# Altium PCB Modulo_Servos.PcbDoc
Units mil, origin at the board's own origin, x right, y up, seen from the top; angles counter-clockwise.
Board outline 3190 x 4055 mil, 2 copper layers (Top Layer, Bottom Layer); 41 components, 39 nets, 157 pads, 4 vias.
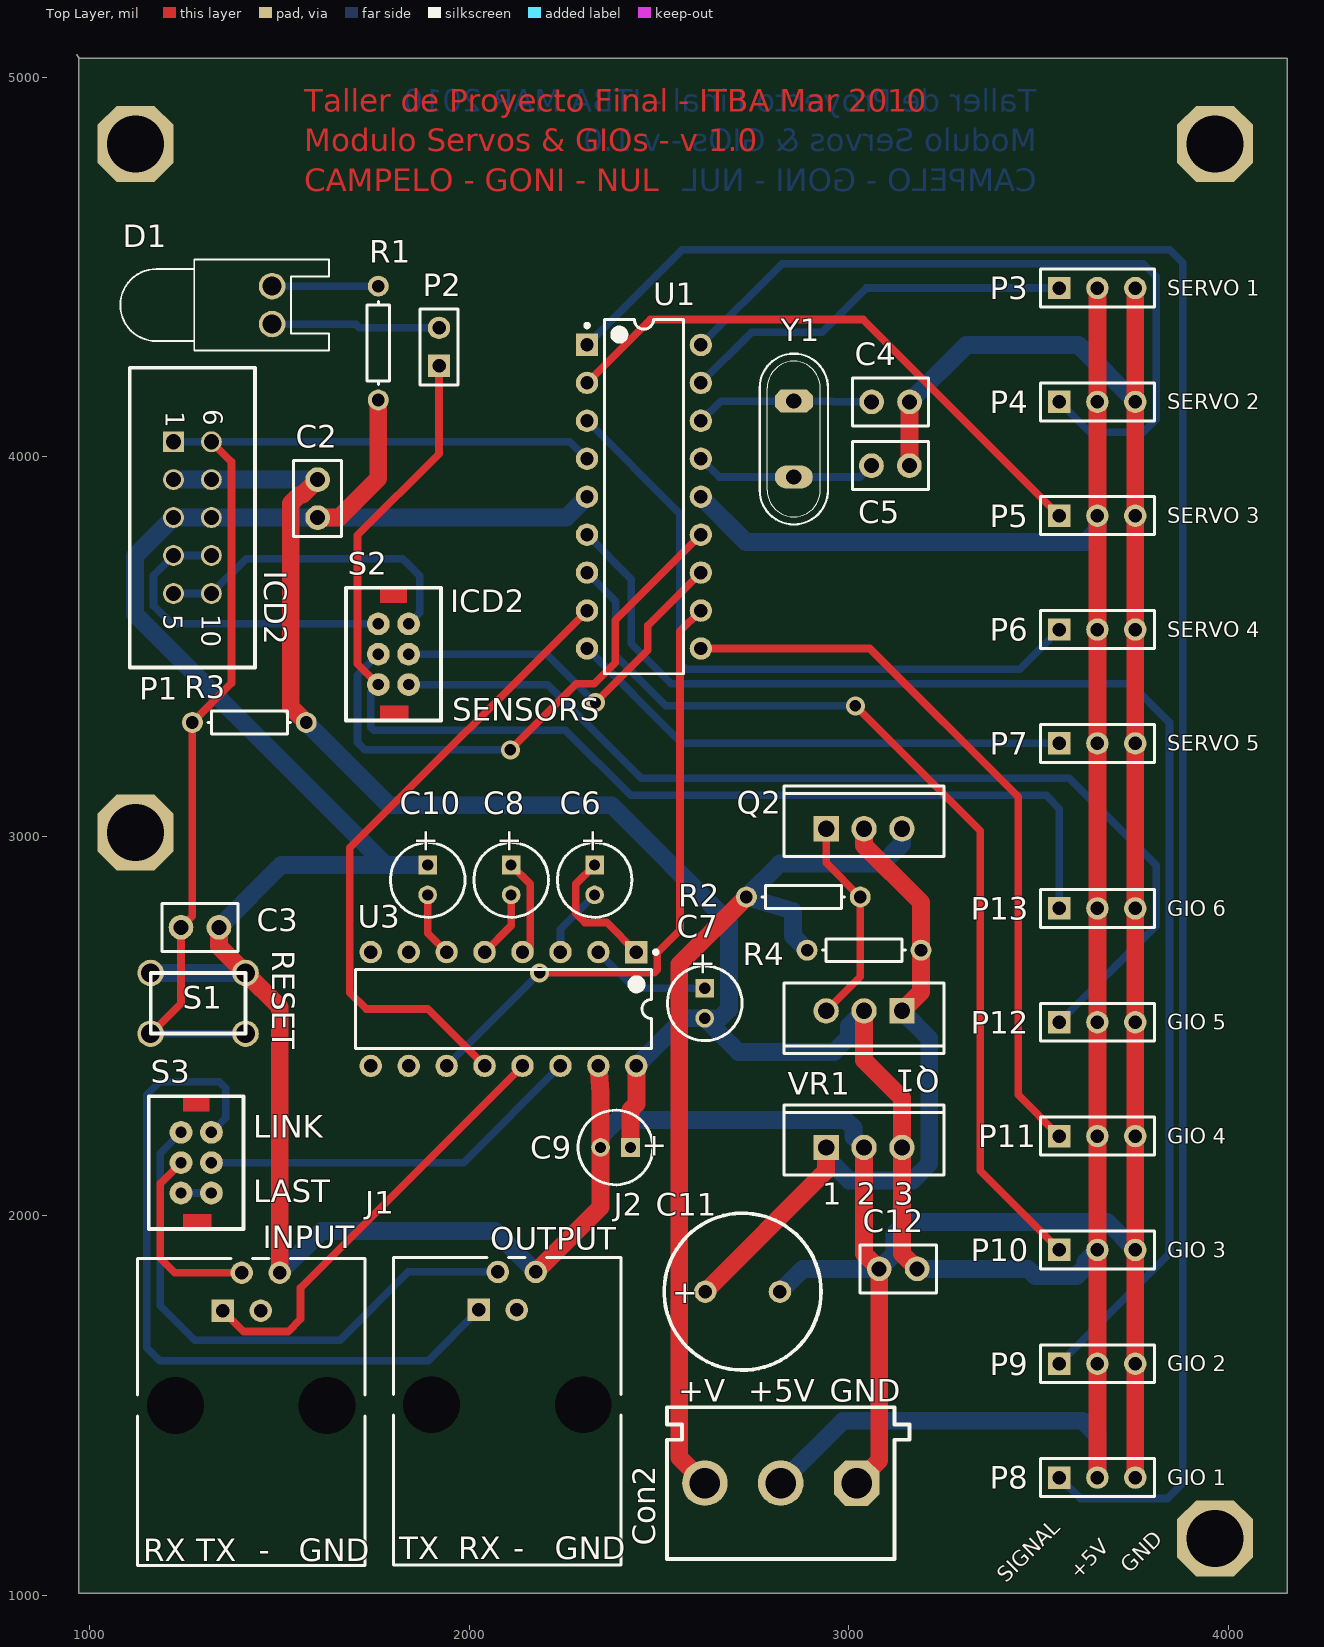
[diagram p0: Top Layer view]
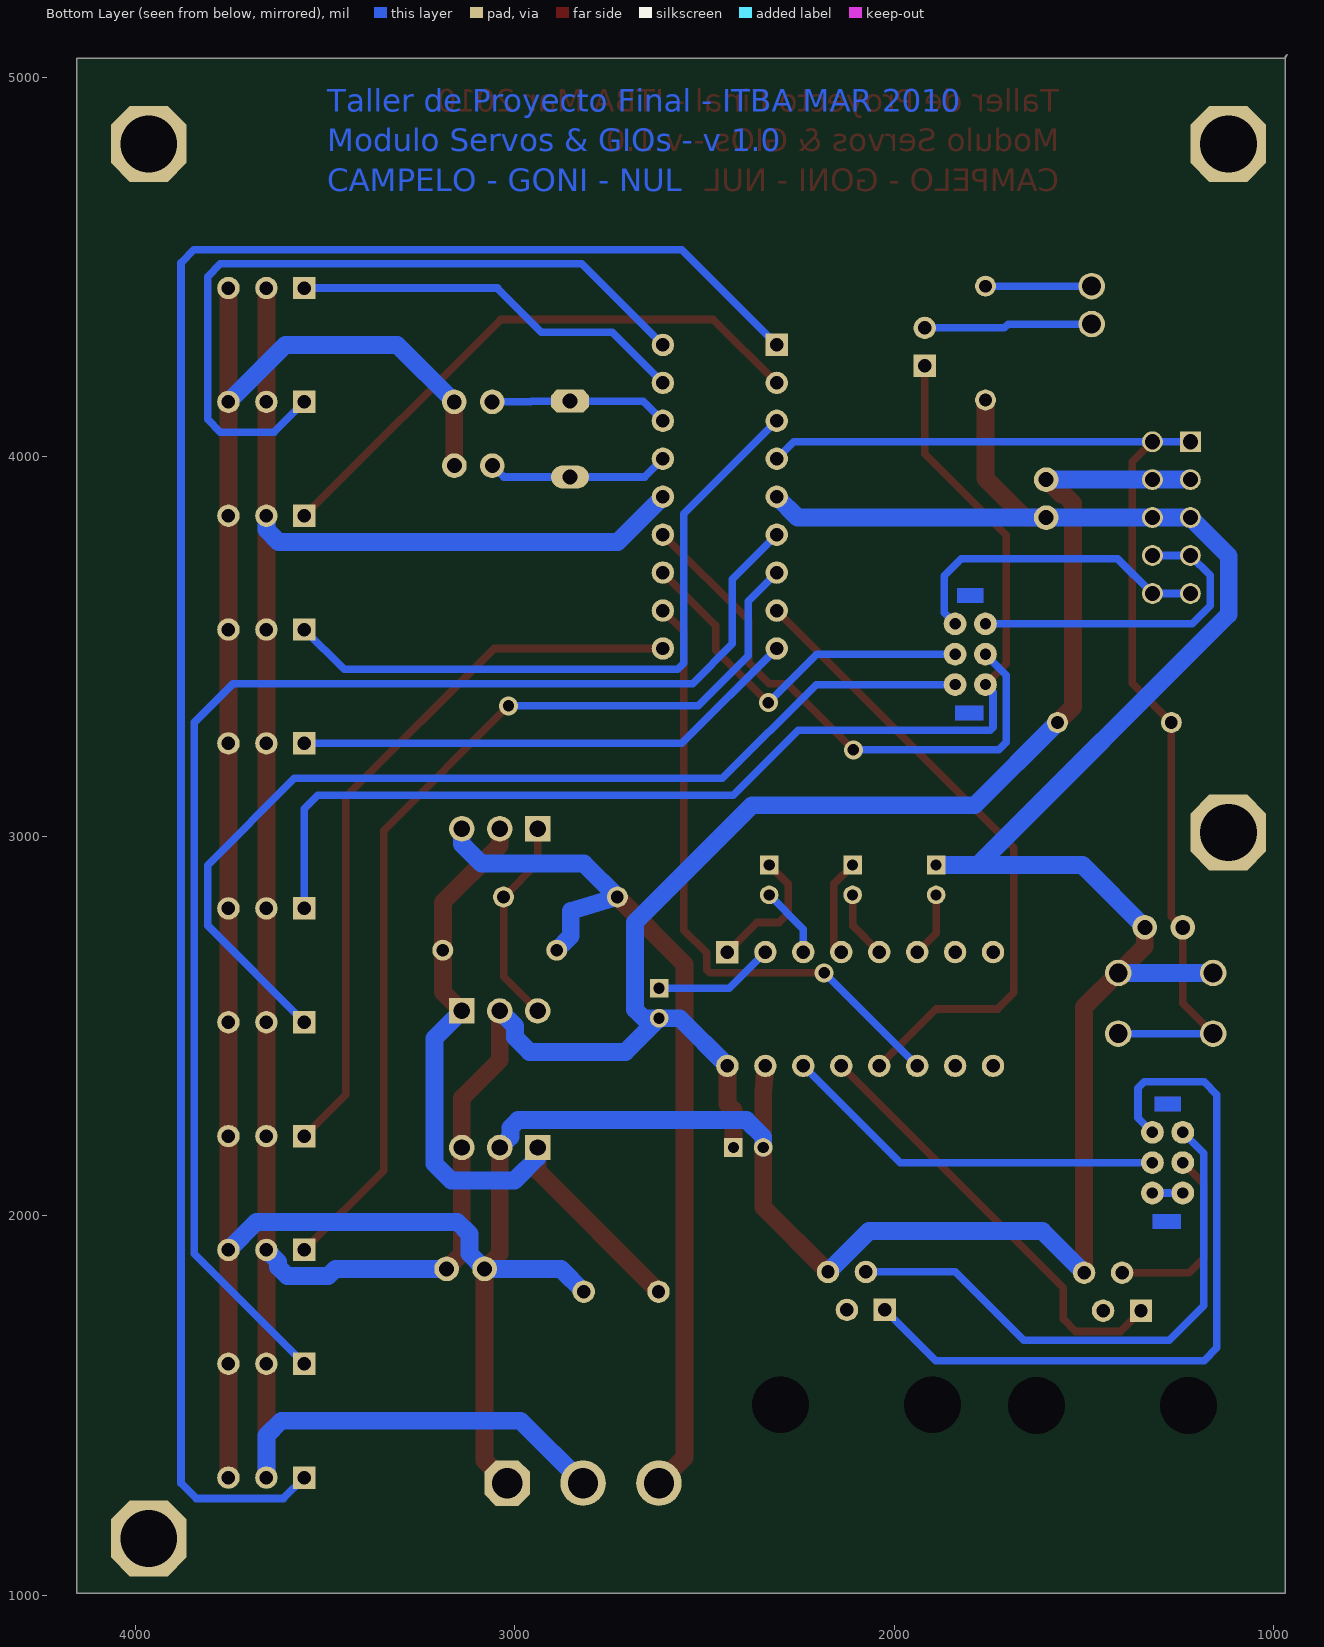
[diagram p1: Bottom Layer view, seen from below]

## Layer stack, top to bottom
Top Layer: signal copper 1.4
Dielectric: dielectric 12.6, FR-4, Dk 4.8
Bottom Layer: signal copper 1.4

## Board outline
970,5050 4155,5050 4155,1005 970,1005 970,5055 965,5060

## Design rules (kind name [scope] priority, off if disabled: settings)
Clearance [All] p1: gap=15
DiffPairsRouting [All] p1: maxlimit=10 minlimit=10 mostfreqgap=10 maxuncoupledlength=750
PolygonConnect [All] p1: connectstyle=Relief reliefconductorwidth=10 reliefentries=4 polygonreliefangle="90 Angle"
RoutingVias [All] p1: holewidth=30 width=50 viastyle="Through Hole" minholewidth=30 minwidth=50 maxholewidth=50 maxwidth=70
SilkscreenOverComponentPads [All] p1: minsilkscreentomaskgap=10
SolderMaskExpansion [All] p1: expansion=4
Width Signal [NOT (InNet('+5V VCC') OR InNet('+V LOGIC') OR InNet('GND') OR InNet('+V IN') OR InNet('VCC_SENSOR_1') OR InNet('VCC_SENSOR_2') OR InNet('VCC_SENSOR_3') OR InNet('VCC_SENSOR_4') OR InNet('VCC_SENSOR_5'))] p1: maxlimit=25 minlimit=15 preferedwidth=20 minimp=50.000000 maximp=50.000000 favimp=50.000000
Width Power [(InNet('+5V VCC') OR InNet('+V LOGIC') OR InNet('GND') OR InNet('+V IN') OR InNet('VCC_SENSOR_1') OR InNet('VCC_SENSOR_2') OR InNet('VCC_SENSOR_3') OR InNet('VCC_SENSOR_4') OR InNet('VCC_SENSOR_5'))] p2: maxlimit=47 minlimit=47 preferedwidth=47 minimp=50.000000 maximp=50.000000 favimp=50.000000
26 further rules are at their usual default settings.

## Components (designator, comment, footprint, x,y, rotation, side; value= is the part's Value field where it differs from the comment)
C2 "Cap" CAPR2.54-5.1x3.2 1600,3890 r90 top
C3 "Cap" CAPR2.54-5.1x3.2 1290,2760 r180 top
C4 "Cap" CAPR2.54-5.1x3.2 3110,4145 r180 top
C5 "Cap" CAPR2.54-5.1x3.2 3109.61,3977.01 r180 top
C6 "Cap Pol1" CAPPR2-5x6.8 2330,2885 r270 top
C7 "Cap Pol1" CAPPR2-5x6.8 2620,2560 r270 top
C8 "Cap Pol1" CAPPR2-5x6.8 2110,2885 r270 top
C9 "Cap Pol1" CAPPR2-5x6.8 2385,2180 r180 top
C10 "Cap Pol1" CAPPR2-5x6.8 1890,2885 r270 top
C11 "Cap Pol1" RB5-10.5 2720,1800 r0 top
C12 "Cap" CAPR2.54-5.1x3.2 3130,1860 r0 top
Con2 "POWER_A" My_CN3 3120,1095 r180 top
D1 "LED0" LED-0 1480,4400 r270 top
J1 "SERIAL A" 15-43-6245 1425,1077.95 r0 top
J2 "SERIAL B" 15-43-6245 2100,1080 r0 top
P1 "ICD2" HEADER10_5x2_B 1270,3840 r270 top
P2 "LED1" HDR1X2 1920,4240 r90 top
P3 "SERVO 1" HDR1X3 3555,4445 r0 top
P4 "SERVO 2" HDR1X3 3555,4145 r0 top
P5 "SERVO 3" HDR1X3 3555,3845 r0 top
P6 "SERVO 4" HDR1X3 3555,3545 r0 top
P7 "SERVO 5" HDR1X3 3555,3245 r0 top
P8 "GIO 1" HDR1X3 3555,1310 r0 top
P9 "GIO 2" HDR1X3 3555,1610 r0 top
P10 "GIO 3" HDR1X3 3555,1910 r0 top
P11 "GIO 4" HDR1X3 3555,2210 r0 top
P12 "GIO 5" HDR1X3 3555,2510 r0 top
P13 "GIO 6" HDR1X3 3555,2810 r0 top
Q1 "TIP42" TO-220 3040,2540 r180 top
Q2 "TIP42" TO-220 3040,3020 r0 top
R1 "Res1" AXIAL-0.3 1760,4300 r270 top
R2 "Res1" AXIAL-0.3 2880,2840 r0 top
R3 "Res1" AXIAL-0.3 1420,3300 r0 top
R4 "Res1" AXIAL-0.3 3040,2700 r0 top
S1 "SW-PB" TS-063 1285,2560 r0 top
S2 "PROGRAM SELECTION" LD-202mini 1800,3480 r270 top
S3 "SERIAL CHAIN" LD-202mini 1280,2140 r270 top
U1 "PIC16F88" PDIP300-P18 2460,3895 r0 top
U3 "MAX232" PE16A 2090,2545 r270 top
VR1 "7805" TO-220 3040,2180 r0 top
Y1 "20MHz" My_Crystal 2855,4047.01 r270 top

## Footprints (in the part's own frame and the unit in brackets; to place one, negate y for a bottom-side part, rotate by r counter-clockwise, add the part's x,y. Pads: shape width x height; smd on the part's side, far side on the other; paste and mask are expansions set on the pad)
15-43-6245 [mm] "Connector; PCB Jack, Thru-Hole; 1-Port; Unshielded without Lightpipes; Right Angle"
  rect 1.5x1.5 hole 0.9: 1(-1.905,17.07)
  round 1.5 hole 0.9: 2(-0.635,19.61) 3(0.635,17.07) 4(1.905,19.61)
  round 2.95 hole 3.81 unplated: MH1(-5.08,10.72) MH2(5.08,10.72)
  silkscreen extent -7.62,0 7.62,20.57
AXIAL-0.3 [mm] "Axial Device, Thru-Hole; 2 Leads; 0.3 in Pin Spacing"
  round 1.4 hole 0.85: 1(-3.81,0) 2(3.81,0)
  silkscreen extent -2.77,-0.76 2.77,0.76
CAPPR2-5x6.8 [mm] "Capacitor, Electrolytic, Radial; Body 5 x 6.8 mm (Dia.xH typ); Pin Spacing 2 mm (typ)"
  rect 1.25x1.25 hole 0.75: 1(-1,0)
  round 1.25 hole 0.75: 2(1,0)
  silkscreen extent -2.5,-2.5 2.5,2.5
CAPR2.54-5.1x3.2 [mm] "Capacitor, Ceramic, Thru-Hole, Dipped Radial; Body 5.1 x 3.2 mm (WxT) Pin Spacing 2.54 mm (typ)"
  round 1.65 hole 1: 1(-1.27,0) 2(1.27,0)
  silkscreen extent -2.55,-1.6 2.55,1.6
HDR1X2 [mm] "Connector; Header; 2 Position"
  rect 1.5x1.5 hole 0.9: 1(0,0)
  round 1.5 hole 0.9: 2(2.54,0)
  silkscreen extent -1.27,-1.27 3.81,1.27
HDR1X3 [mm] "Connector; Header; 3 Position"
  rect 1.5x1.5 hole 0.9: 1(0,0)
  round 1.5 hole 0.9: 2(2.54,0) 3(5.08,0)
  silkscreen extent -1.27,-1.27 6.35,1.27
HEADER10_5x2_B [mil] "Header con polaridad para 10 pines (5x2)"
  rect 55x55 hole 40: 1(-200,-50)
  round 55 hole 40: 2(-100,-50) 3(0,-50) 4(100,-50) 5(200,-50) 6(-200,50) 7(-100,50) 8(0,50) 9(100,50) 10(200,50)
  silkscreen extent -395,-165 395,165
LD-202mini [mil] "Doble inversor mini 90 grados"
  round 60 hole 30: 1(0,40) 2(-80,40) 3(80,40) 4(0,-40) 5(-80,-40) 6(80,-40)
  Multi-Layer region: 135,-35 175,-35 175,40 135,40
  Multi-Layer region: -175,-35 -135,-35 -135,35 -175,35
  silkscreen extent -175,-125 175,125
LED-0 [mil] "Typical INFRARED GaAs LED; 2 Leads"
  round 70 hole 50: 1(50,0) 2(-50,0)
  silkscreen extent -120,-400 120,150
My_CN3 [mil]
  oct 120x120 hole 80: 1(99.5,-200.5)
  round 120 hole 80: 2(299.5,-200.5) 3(499.5,-200.5)
  silkscreen extent -40,-400 600,0
My_Crystal [mil]
  oct 60x100 hole 40: 1(-100,0)
  oval 60x100 hole 40: 2(100,0)
  silkscreen extent -225,-90 225,90
PDIP300-P18 [mm] "DIP, 18-Leads, Row Spacing 7.62mm, Pitch 2.54mm, Body 22.9x6.6mm"
  rect 1.5x1.5 hole 0.9: 1(-3.81,10.16)
  round 1.5 hole 0.9: 2(-3.81,7.62) 3(-3.81,5.08) 4(-3.81,2.54) 5(-3.81,0) 6(-3.81,-2.54) 7(-3.81,-5.08) 8(-3.81,-7.62) 9(-3.81,-10.16) 10(3.81,-10.16) 11(3.81,-7.62) 12(3.81,-5.08) 13(3.81,-2.54) 14(3.81,0) 15(3.81,2.54) 16(3.81,5.08) 17(3.81,7.62) 18(3.81,10.16)
  silkscreen extent -3.93,-11.85 2.65,11.85, body extent -3.6,-11.8 3.6,11.8, height 5.34
PE16A [mm] "DIP, 16-Leads, Row Spacing 7.62mm, Pitch 2.54mm, Body 19.18x6.99mm"
  rect 1.5x1.5 hole 0.9: 1(-3.81,8.89)
  round 1.5 hole 0.9: 2(-3.81,6.35) 3(-3.81,3.81) 4(-3.81,1.27) 5(-3.81,-1.27) 6(-3.81,-3.81) 7(-3.81,-6.35) 8(-3.81,-8.89) 9(3.81,-8.89) 10(3.81,-6.35) 11(3.81,-3.81) 12(3.81,-1.27) 13(3.81,1.27) 14(3.81,3.81) 15(3.81,6.35) 16(3.81,8.89)
  silkscreen extent -3.93,-9.9 2.65,10.32, body extent -3.3,-9.9 3.3,9.9, height 5.08
RB5-10.5 [mm] "Motor, General Kind; 2 Leads"
  round 1.5 hole 0.9: 1(-2.5,0) 2(2.5,0)
  silkscreen extent -5.25,-5.25 5.25,5.25
TO-220 [mm] "TO, Thru-Hole, Vertical, Heatsink Mounted; 3 In-Line Leads; Pitch 2.54 mm"
  rect 1.7x1.7 hole 1.1: 1(-2.54,0)
  round 1.7 hole 1.1: 2(0,0) 3(2.54,0)
  silkscreen extent -5.35,-1.85 5.35,2.85
TS-063 [mil] "Boton normal abierto"
  round 70 hole 50: 1(-125,80) 1(125,80) 2(-125,-80) 2(125,-80)
  silkscreen extent -125,-80 125,80

## Part data
C2 C3 C4 C5 C12: "Capacitor"
C6 C7 C8 C9 C10 C11: "Polarized Capacitor (Radial)"
Con2: library part "CON3 pin Green", "Connector green screw"
D1: "Typical INFRARED GaAs LED"
J1 J2: library part 15-43-6245, "Right Angle, Standard Profile, RJ45-Keyed, Flange Mount PCB Jack"
P1: library part "Header 5X2A", "Header, 5-Pin, Dual row"
P2: library part "Header 2", "Header, 2-Pin"
P3 P4 P5 P6 P7 P8 P9 P10 P11 P12 P13: library part "Header 3", "Header, 3-Pin"
Q1 Q2: library part D45H8, "PNP Power Amplifier"
R1 R2 R3 R4: "Resistor"
S1: "Switch"
S2 S3: library part SW-DPDT, "Double-Pole, Double-Throw Switch"
U1: library part PIC16F88-E/P, "Enhanced FLASH Microcontroller with nanoWatt Technology, 10-Bit A/D, 4K (x14-Bit words) FLASH, 368 Bytes RAM, 18-Pin PDIP, Standard VDD Range, Extended Temperature"
U3: library part MAX232ACPE, "+5V Powered, Multi-Channel RS-232 Driver/Receiver"
VR1: library part "Volt Reg", "Voltage Regulator"
Y1: library part XTAL, "Crystal Oscillator"

## Free pads (board coordinates)
  oct 200x200 hole 150: 1(1120,3010) 1(1120,4825) 1(3965,1150) 1(3965,4825)

## Via types
v1: diameter 50, hole 30, Top Layer to Bottom Layer, 4 vias

## Nets (pads, with @x,y where several pads share a name; then routed paths per layer and width w, separated by ;. In a path a pad name is that pad's centre, name@x,y a point inside that pad or via, vN(x,y) a via of type N, cw(c..) or ccw(c..) an arc to the next point about the centre after c; other vN are vias at no path point)
"+5V VCC": C2.2 C7.2 C9.1 C12.2 Con2.2 P1.2 P1.7 P3.2 P4.2 P5.2 P6.2 P7.2 P8.2 P9.2 P10.2 P11.2 P12.2 P13.2 Q1.2 R3.2 U1.14 U3.16 VR1.3 | length 10245.3
  Top Layer w47: R3.2 1529,3341 1529,3877 1552,3900 1560,3900 C2.2 ; C9.1 2424.37,2279 2440,2294.63 U3.16 ; Q1.2 3040,2410 3140,2310 VR1.3 3140,1900 C12.2 ; P8.2 P9.2 P10.2 P11.2 P12.2 P13.2 P7.2 P6.2 P5.2 P4.2 P3.2
  Bottom Layer w47: P1.2 P1.7 C2.2 ; R3.2 1788,3082 2375,3082 2684,2773 2684,2544 2660.63,2520.63 C7.2 ; U3.16 2565.63,2520.63 C7.2 ; U1.14 2729,3776 3623,3776 3655,3808 P5.2 ; Con2.2 2985,1460 3616,1460 3655,1421 P8.2 ; Q1.2 3000,2500 3000,2470.37 2961.63,2432 2708.63,2432 C7.2 ; C12.2 3473,1860 3492,1841 3600,1841 3624,1865 3624,1879 P10.2
"+V IN": C11.1 Q1.1 Q2.2 R4.2 VR1.1 | length 1849.1
  Top Layer w47: C11.1 2940,2118.43 VR1.1 ; Q2.2 3040,2976 3190,2826 R4.2 3190,2590 Q1.1
  Bottom Layer w47: VR1.1 2940,2154 3001,2093 3168,2093 3212,2137 3212,2468 Q1.1
"+V LOGIC": Con2.3 Q2.3 R2.1 R4.1 | length 2400.5
  Top Layer w47: Con2.3 2553,1363 2553,2663 R2.1
  Bottom Layer w47: R4.1 2853,2737 2853,2803 R2.1 2818,2928 3088,2928 3140,2980 Q2.3
GIO_RA2: P8.1 U1.1 | length 5269.4
  Bottom Layer w20: U1.1 2561,4546 3846,4546 3880,4512 3880,1295 3840,1255 3610,1255 P8.1
GIO_RB0: P9.1 U1.6 | length 3650.3
  Bottom Layer w20: U1.6 2427,3678 2427,3507 2532,3402 3743,3402 3845,3300 3845,1900 P9.1
GIO_RB1: P10.1 U1.7 | length 2593.6
  Top Layer w20: v1(3017,3344) 3346,3015 3346,2119 P10.1
  Bottom Layer w20: U1.7 2385.46,3619.54 2385.46,3475.54 2517,3344 v1(3017,3344)
GIO_RB4: P11.1 U1.10 | length 1937.1
  Top Layer w20: U1.10 3055,3495 3446,3104 3446,2319 P11.1
GIO_RB6: P12.1 S2.3 | length 2686.8
  Bottom Layer w20: S2.3 2206.21,3400 2453.21,3153 3581,3153 3810,2924 3810,2765 P12.1
GIO_RB7: P2.1 P13.1 S2.6 | length 3239.2
  Top Layer w20: S2.6 1705,3455 1705,3793 1920,4008 P2.1
  Bottom Layer w20: S2.6 1740,3380 1740,3288 1748,3280 2253,3280 2425,3108 3520,3108 3555,3073 P13.1
GND: C2.1 C3.1 C4.1 C5.1 C9.2 C10.1 C11.2 C12.1 Con2.1 J1.4 J2.4 P1.3 P1.8 P3.3 P4.3 P5.3 P6.3 P7.3 P8.3 P9.3 P10.3 P11.3 P12.3 P13.3 R1.2 S1.1 U1.5 U3.15 VR1.2 | length 12893.8
  Top Layer w47: C3.1 1340,2710 1410,2640 1500,2550 J1.4 ; C2.1 1657,3840 1760,3943 R1.2 ; J2.4 2345.63,2022.68 C9.2 2345.63,2324.63 U3.15 ; Con2.1 3080,1355 C12.1 3040,1900 VR1.2 ; C5.1 3160,4016.8 C4.1 ; P8.3 P9.3 P10.3 P11.3 P12.3 P13.3 P7.3 P6.3 P5.3 P4.3 P3.3
  Bottom Layer w47: S1.1@1160,2640 S1.1@1410,2640 ; C3.1 1504.37,2924.37 1779.63,2924.37 ; J1.4 1610,1960 2067.05,1960 J2.4 ; U1.5 2255,3840 C2.1 P1.8 P1.3 1119,3739 1119,3585 1779.63,2924.37 ; C9.2 2345.63,2208 2389.63,2252 2992,2252 3012,2232 3012,2208 VR1.2 ; C11.2 2878.43,1860 C12.1 3120,1900 3120,1952 3152,1984 3681,1984 P10.3 ; C4.1 3310,4295 3605,4295 P4.3 ; 1779.63,2924.37 C10.1 1779.63,2924.37
ICD2_CLK: P1.5 P1.10 S2.2 | length 844.8
  Bottom Layer w20: P1.5 P1.10 1412,3732 1824,3732 1869,3687 1869,3589 S2.2
ICD2_CLK/RB6: S2.1 U1.12 | length 1003
  Top Layer w20: v1(2332.21,3352.21) 2470.56,3490.56 2470.56,3555.56 U1.12
  Bottom Layer w20: S2.1 2204.42,3480 v1(2332.21,3352.21)
ICD2_DATA: P1.4 P1.9 S2.5 | length 866.4
  Bottom Layer w20: P1.9 P1.4 1167.5,3687.5 1167.5,3607.5 1215,3560 S2.5
ICD2_DATA/RB7: S2.4 U1.13 | length 1468.8
  Top Layer w20: v1(2108,3228) 2282.21,3402.21 2329.21,3402.21 2384,3457 2384,3569 U1.13
  Bottom Layer w20: S2.4 1705,3425 1705,3247.52 1724.52,3228 v1(2108,3228)
LED1: D1.1 P2.2 | length 444.1
  Bottom Layer w20: D1.1 1700,4350 1710,4340 P2.2
MAX_TX: S3.1 U3.14 | length 1025.6
  Bottom Layer w20: S3.1 1985,2140 U3.14
MCLR: C3.2 P1.1 P1.6 R3.1 S1.2 U1.4 | length 3028.8
  Top Layer w20: S1.2@1160,2480 1240,2560 C3.2 1270,2790 R3.1 1373,3403 1373,3987 P1.6
  Bottom Layer w20: S1.2@1160,2480 S1.2@1410,2480 ; P1.1 P1.6 2265,4040 U1.4
NetC4_2: C4.2 U1.16 Y1.1 | length 472.4
  Bottom Layer w20: U1.16 2662.01,4147.01 Y1.1 2956,4147.01 2958.01,4145 C4.2
NetC5_2: C5.2 U1.15 Y1.2 | length 481.9
  Bottom Layer w20: U1.15 2657.99,3947.01 Y1.2 3029.61,3947.01 C5.2
NetC6_1: C6.1 U3.1 | length 350.3
  Top Layer w20: C6.1 2280,2874.37 2280,2797 2304,2773 2362,2773 U3.1
NetC6_2: C6.2 U3.3 | length 187.9
  Bottom Layer w20: U3.3 2240,2755.63 C6.2
NetC7_1: C7.1 U3.2 | length 319.6
  Bottom Layer w20: U3.2 2435.63,2599.37 C7.1
NetC8_1: C8.1 U3.4 | length 270.1
  Top Layer w20: C8.1 2160,2874.37 2160,2695 U3.4
NetC8_2: C8.2 U3.5 | length 179.6
  Top Layer w20: U3.5 2110,2765 C8.2
NetC10_2: C10.2 U3.6 | length 171.3
  Top Layer w20: C10.2 1890,2745 U3.6
NetD1_2: D1.2 R1.1 | length 280
  Bottom Layer w20: D1.2 R1.1
NetQ1_3: Q1.3 Q2.1 R2.2 | length 554.6
  Top Layer w20: Q1.3 3030,2630 R2.2 2940,2930 Q2.1
NetS3_3: S3.3 S3.6 | length 80
  Bottom Layer w20: S3.6 S3.3
PIC_RX: U1.8 U3.12 | length 1700.8
  Top Layer w20: U3.12 1890,2545 1728,2545 1685,2588 1685,2970 U1.8
PIC_TX: U1.11 U3.11 | length 1654.4
  Top Layer w20: v1(2185,2640) 2487,2640 2495,2648 2495,2693 2555,2753 2555,3540 U1.11
  Bottom Layer w20: U3.11 v1(2185,2640)
PWM_SERVO_1: P3.1 U1.17 | length 1048.6
  Bottom Layer w20: U1.17 2744,4329 2930,4329 3046,4445 P3.1
PWM_SERVO_2: P4.1 U1.18 | length 1980.9
  Bottom Layer w20: U1.18 2824,4509 3776,4509 3810,4475 3810,4099 3776,4065 3635,4065 P4.1
PWM_SERVO_3: P5.1 U1.2 | length 1528.3
  Top Layer w20: U1.2 2477,4362 3038,4362 P5.1
PWM_SERVO_4: P6.1 U1.3 | length 1790.6
  Bottom Layer w20: U1.3 2555,3850 2555,3456 2571,3440 3450,3440 P6.1
PWM_SERVO_5: P7.1 U1.9 | length 1348.6
  Bottom Layer w20: U1.9 2560,3245 P7.1
SERIAL_A_RX: J1.1 U3.13 | length 1150.8
  Top Layer w20: J1.1 1405,1695 1522,1695 1555,1728 1555,1810 U3.13
SERIAL_A_TX: J1.2 S3.4 | length 505.5
  Top Layer w20: S3.4 1185,2085 1185,1888 1223,1850 J1.2
SERIAL_B_RX: J2.2 S3.5 | length 1482.1
  Bottom Layer w20: S3.5 1185,2165 1185,1763 1276,1672 1659,1672 1839.05,1852.05 J2.2
SERIAL_B_TX: J2.1 S3.2 | length 1972.5
  Bottom Layer w20: S3.2 1358,2258 1358,2336 1341,2353 1184,2353 1150,2319 1150,1652 1184,1618 1890.95,1618 J2.1
pads on no net: J1.3 J1.MH1 J1.MH2 J2.3 J2.MH1 J2.MH2 U3.7 U3.8 U3.9 U3.10

## Other copper
Top Layer:
  text "Taller de Proyecto Final - ITBA Mar 2010" at 1565,4910 h60
  text "Modulo Servos & GIOs - v 1.0" at 1565,4805 h60
  text "CAMPELO - GONI - NUL" at 1565,4700 h60
Bottom Layer:
  text "Taller de Proyecto Final - ITBA MAR 2010" at 3495,4910 h60
  text "Modulo Servos & GIOs - v 1.0" at 3495,4805 h60
  text "CAMPELO - GONI - NUL" at 3495,4700 h60

## Silkscreen, mask and mechanical layers (free items; w line width, h text height)
Top Overlay:
  text "ICD2" at 1950,3590 h60
  text "SENSORS" at 1955,3305 h60
  text "RESET" at 1480,2700 h60 r270
  text "LINK" at 1430,2205 h60
  text "LAST" at 1430,2035 h60
  text "INPUT" at 1455,1915 h60
  text "OUTPUT" at 2055,1910 h60
  text "+V" at 2550,1510 h60
  text "+5V" at 2735,1510 h60
  text "GND" at 2950,1510 h60
  text "TX" at 1815,1095 h60
  text "RX" at 1970,1095 h60
  text "-" at 2115,1095 h60
  text "GND" at 2225,1095 h60
  text "RX" at 1140,1090 h60
  text "TX" at 1280,1090 h60
  text "-" at 1445,1090 h60
  text "GND" at 1550,1090 h60
  text "GND" at 3740,1055 h40 r45
  text "+5V" at 3605,1040 h40 r45
  text "SIGNAL" at 3415,1030 h40 r45

## Text inside footprints (layer, text, board x,y; h text height)
C6: Top Overlay "+" at 2300.47,3021.81 h59.06 r270
C7: Top Overlay "+" at 2590.47,2696.81 h59.06 r270
C8: Top Overlay "+" at 2080.47,3021.81 h59.06 r270
C9: Top Overlay "+" at 2521.81,2209.53 h59.06 r180
C10: Top Overlay "+" at 1860.47,3021.81 h59.06 r270
C11: Top Overlay "+" at 2535,1770 h59.06
P1: Top Overlay "6" at 1300,4125 h50 r270; Top Overlay "10" at 1295,3585 h50 r270; Top Overlay "5" at 1195,3585 h50 r270; Top Overlay "1" at 1200,4120 h50 r270
VR1: Top Overlay "1" at 2930.16,2029.41 h59.06; Top Overlay "2" at 3020.32,2029.41 h59.06; Top Overlay "3" at 3120.32,2029.41 h59.06